# Altium PCB HCHO_Benchmark_B3.PcbDoc
Units mm, origin at the board's own origin, x right, y up, seen from the top; angles counter-clockwise.
Board outline 87.75 x 66 mm, 2 copper layers (Top Layer, Bottom Layer), stack 1.671 mm thick; 37 components, 36 nets, 119 pads, 40 vias.
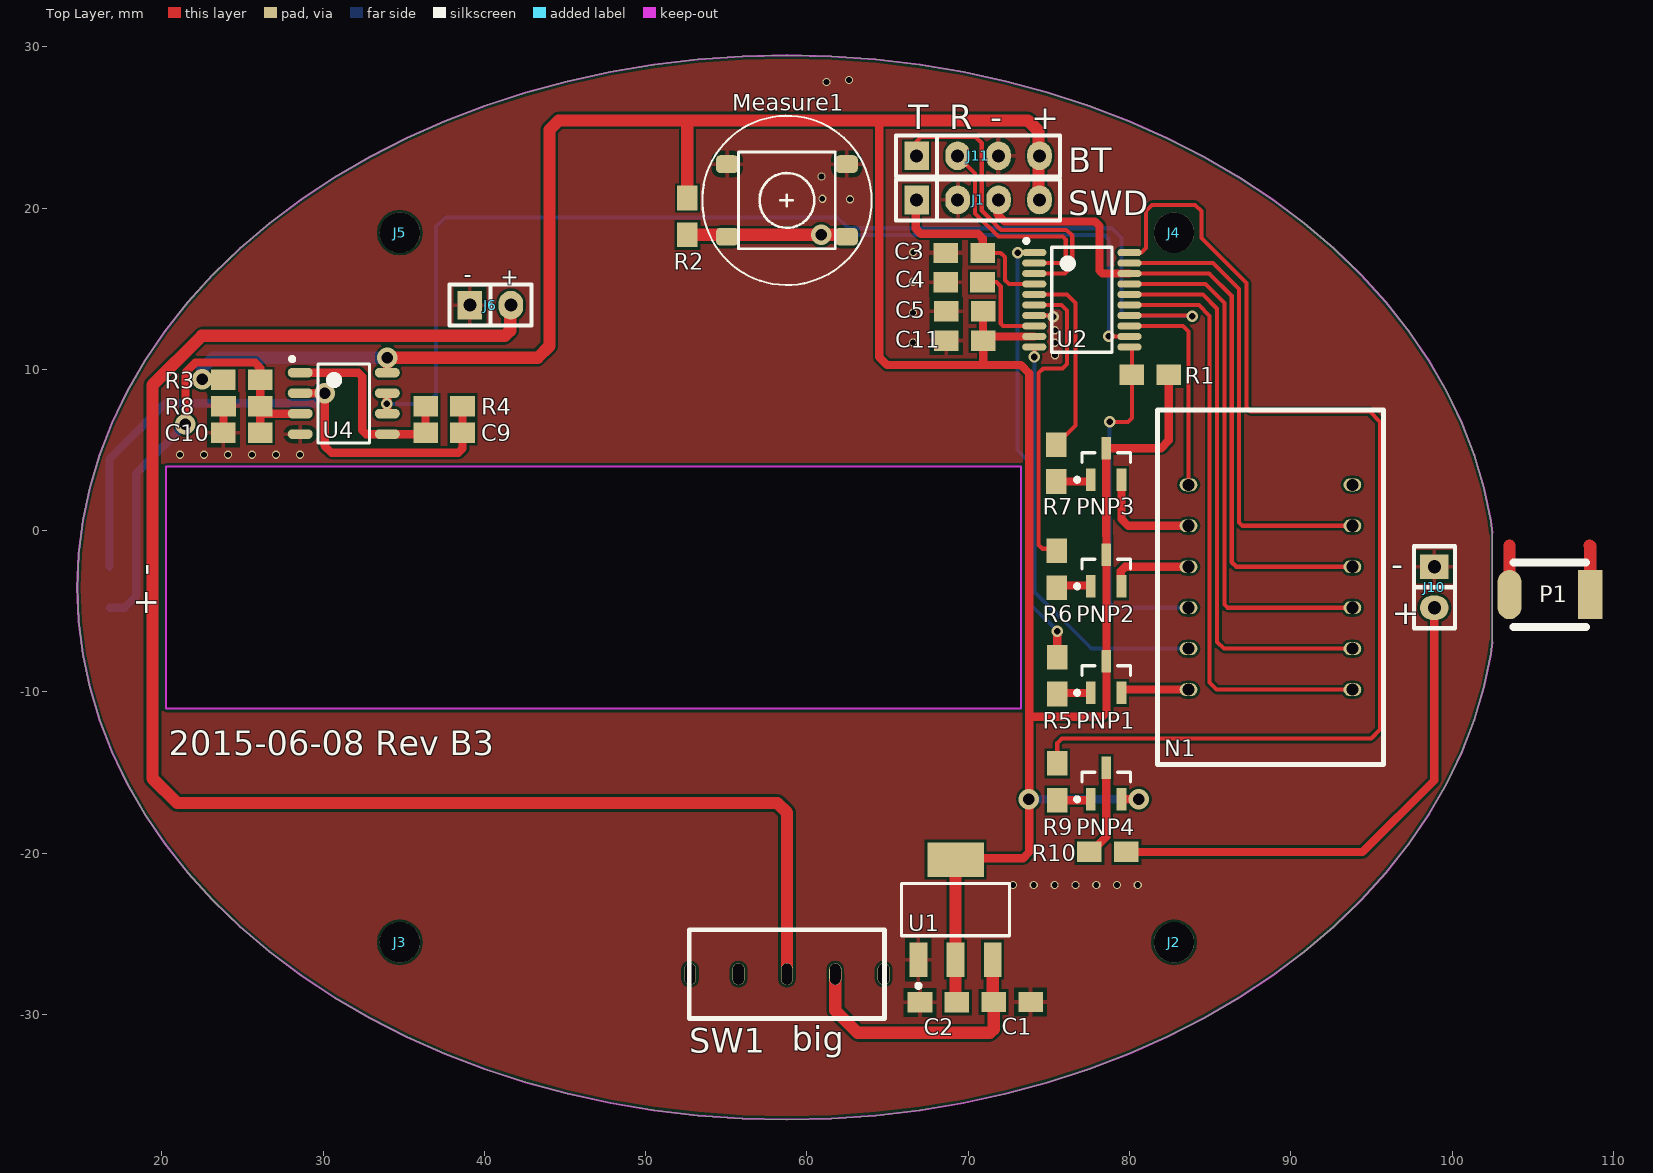
[diagram p0: Top Layer view]
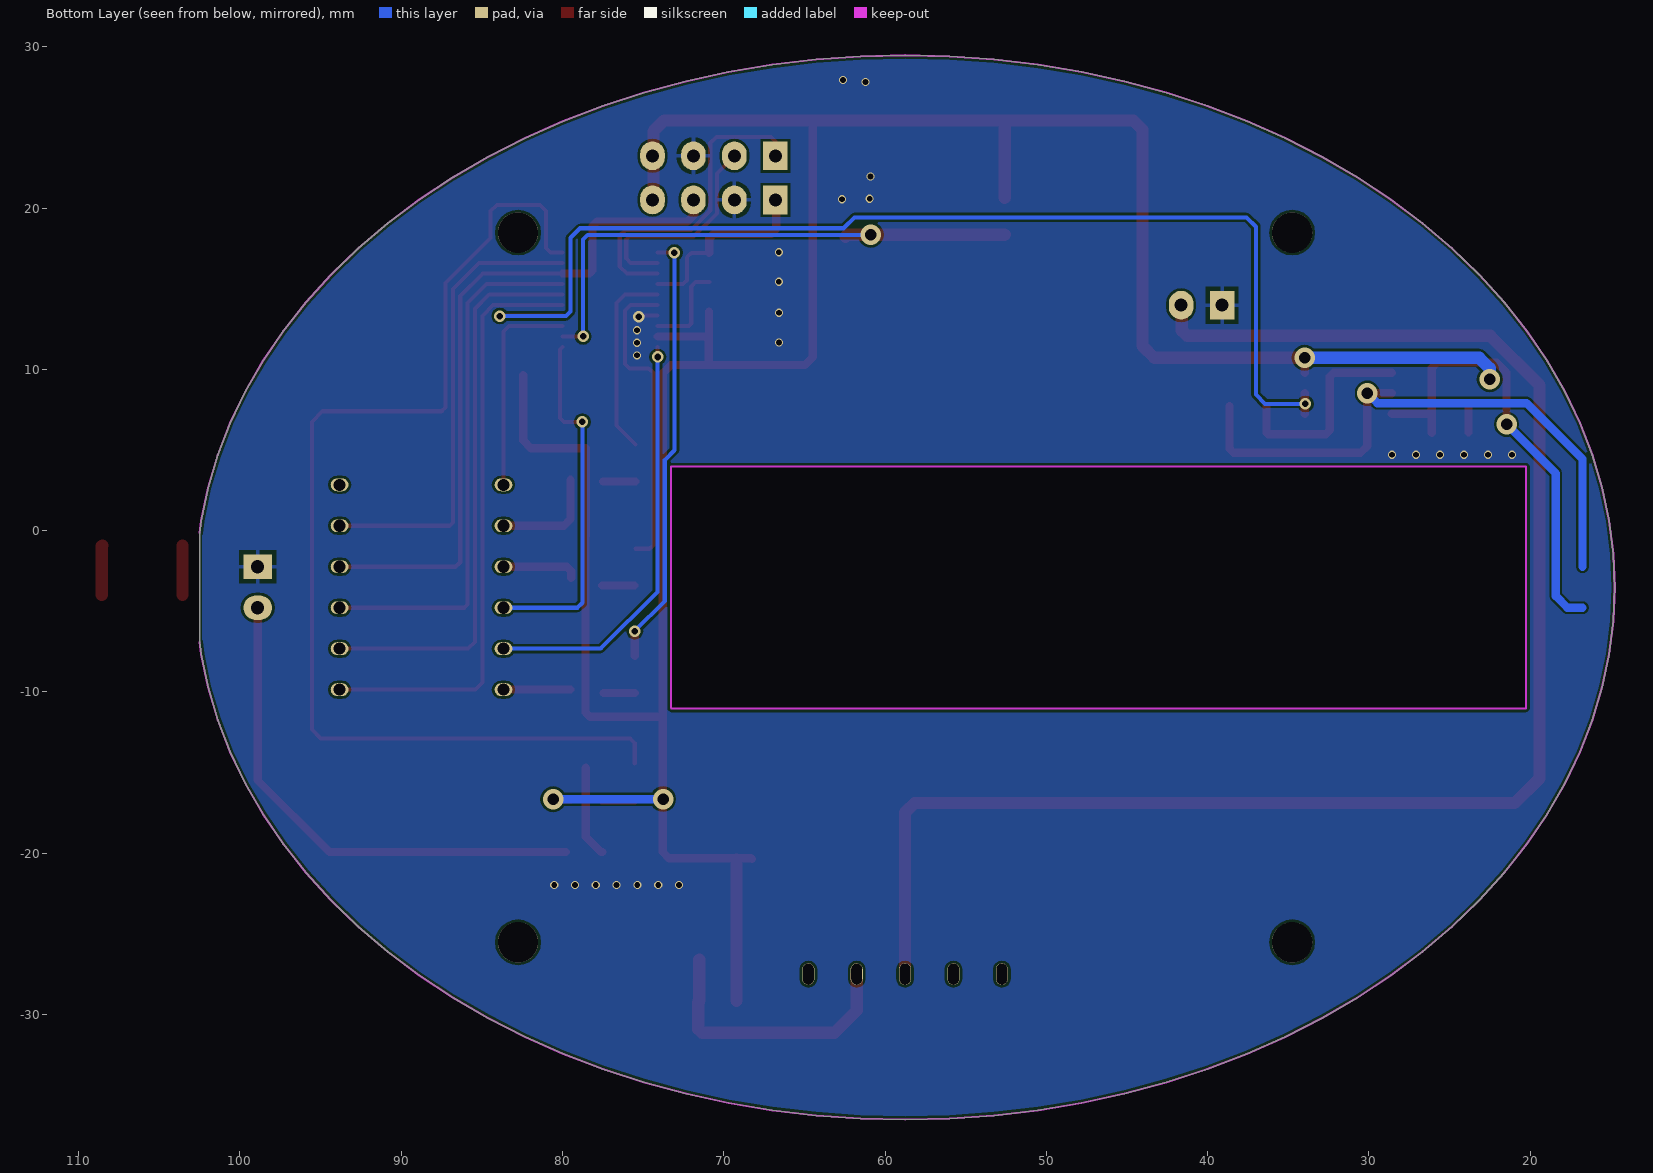
[diagram p1: Bottom Layer view, seen from below]

## Layer stack, top to bottom
Top Layer: signal copper 0.0356
Dielectric: core 1.6, FR-4, Dk 4.8
Bottom Layer: signal copper 0.0356

## Board outline
21.609,-21.206 20.202,-19.421 18.947,-17.574 17.849,-15.672 16.913,-13.721 16.142,-11.73 15.539,-9.707 15.106,-7.659 14.846,-5.596 14.759,-3.523 14.846,-1.451 15.106,0.613 15.539,2.66 16.142,4.683 16.913,6.674 17.849,8.625 18.947,10.527 20.202,12.374 21.609,14.159 23.163,15.873 24.857,17.512 26.685,19.067 28.639,20.533 30.713,21.904 32.897,23.174 35.183,24.339 37.562,25.395 40.025,26.336 42.562,27.159 45.163,27.861 47.817,28.44 50.515,28.892 53.245,29.216 55.997,29.411 58.759,29.477 61.522,29.411 64.274,29.216 67.004,28.892 69.702,28.44 72.356,27.861 74.957,27.159 77.494,26.336 79.957,25.395 82.336,24.339 84.622,23.174 86.806,21.904 88.88,20.533 90.834,19.067 92.662,17.512 94.356,15.873 95.91,14.159 97.317,12.374 98.572,10.527 99.67,8.625 100.606,6.674 101.377,4.683 101.98,2.66 102.413,0.613 102.509,-0.15 102.509,-0.155 102.509,-6.898 102.413,-7.659 101.98,-9.707 101.377,-11.73 100.606,-13.721 99.67,-15.672 98.572,-17.574 97.317,-19.421 95.91,-21.206 94.356,-22.92 92.662,-24.558 90.834,-26.113 88.88,-27.579 86.806,-28.95 84.622,-30.221 82.336,-31.386 79.957,-32.442 77.494,-33.383 74.957,-34.206 72.356,-34.908 69.702,-35.487 67.004,-35.939 64.274,-36.263 61.522,-36.458 58.759,-36.523 55.997,-36.458 53.245,-36.263 50.515,-35.939 47.817,-35.487 45.163,-34.908 42.562,-34.206 40.025,-33.383 37.562,-32.442 35.183,-31.386 32.897,-30.221 30.713,-28.95 28.639,-27.579 26.685,-26.113 24.857,-24.558 23.163,-22.92
cut-out: 20.265,3.967 20.272,3.96 73.266,3.96 73.266,-11.009 73.25,-11.024 20.265,-11.024

## Design rules (kind name [scope] priority, off if disabled: settings)
Clearance "6mil Special" [(HasFootprint('FPC 0.5mm 4P') OR HasFootprint('FPC 0.5mm 16P') OR HasFootprint('QFN40P500X500X90_HS-41L'))] p1: gap=0.152
Clearance "8mil all" [All] p2: gap=0.152
ComponentClearance [All] p1: gap=-100 collisioncheckmode=3 verticalgap=0.254 showdistances=FALSE
Height [All] p1: minheight=0 maxheight=50.8 prefheight=12.7
HoleSize [All] p1: absolutevalues=TRUE maxlimit=1817.048 minlimit=0 maxpercent=80.000 minpercent=20.000
HoleToHoleClearance [All] p1: gap=0.203 allowstackedmicrovias=TRUE
MinimumSolderMaskSliver [All] p1: minsoldermaskwidth=0
PolygonConnect PolygonConnect_1 [isvia] p1: connectstyle=Direct reliefconductorwidth=0.254 reliefentries=4 polygonreliefangle="90 Angle" airgapwidth=0.254
PolygonConnect [All] p2: connectstyle=Relief reliefconductorwidth=0.254 reliefentries=4 polygonreliefangle="90 Angle" airgapwidth=0.254
RoutingCorners [All] p1: cornerstyle=45-Degree minsetback=0.254 maxsetback=2.54
RoutingVias [All] p1: holewidth=0.356 width=0.508 viastyle="Through Hole" minholewidth=0.356 minwidth=0.508 maxholewidth=2.54 maxwidth=5.08
SilkToSilkClearance [All] p1: silktosilkclearance=0
SilkToSolderMaskClearance [IsPad] p1: minsilkscreentomaskgap=0 clearancetoexposedcopper=TRUE
SolderMaskExpansion [All] p1: expansion=0.102
Width 20mil_Power [(InNet('EP_SUPPLY&VBAT') OR InNet('PSUPPLY') OR InNet('P_3.3V') OR InNet('PSUPPLYBAT') OR InNet('P_3.3V') OR InNet('P_5V'))] p1: maxlimit=1000 minlimit=0.203 preferedwidth=0.508
Width 8mil_Basic [All] p2: maxlimit=100 minlimit=0.203 preferedwidth=0.254
20 further rules are at their usual default settings.

## Components (designator, comment, footprint, x,y, rotation, side; value= is the part's Value field where it differs from the comment)
C1 "10uf" C0805 72.724,-29.224 r0 top
C2 "10uf" C0805 68.154,-29.25 r180 top
C3 "1uf" C0805 69.756,17.216 r0 top
C4 "1uf" C0805 69.743,15.406 r0 top
C5 "1uf" C0805 69.783,13.597 r180 top
C9 "1uf" C0805 37.501,6.076 r0 top
C10 "10uf" C0805 24.963,6.076 r180 top
C11 "10uf" C0805 69.788,11.788 r180 top
J1 "CON4" CON4 70.612,20.507 r0 top
J2 "CON1" 2.5MM 82.76,-25.523 r0 top
J3 "CON1" 2.5MM 34.76,-25.523 r0 top
J4 "CON1" 2.5MM 82.76,18.477 r0 top
J5 "CON1" 2.5MM 34.76,18.477 r0 top
J6 "CON2" CON2 40.376,13.981 r0 top
J10 "CON2" CON2 98.902,-3.508 r270 top
J11 "CON4" CON4 70.612,23.241 r0 top
Measure1 "Patch_6x6x5" PATCH6X6X5 58.76,20.477 r180 top
N1 "LG3631BH" LG3631BH 88.742,-3.508 r90 top
P1 "photodetector" BPW34 106.065,-3.965 r180 top
PNP1 "8550" SOT23-3 78.556,-9.077 r90 top
PNP2 "8550" SOT23-3 78.556,-2.473 r90 top
PNP3 "8550" SOT23-3 78.556,4.131 r90 top
PNP4 "8550" SOT23-3 78.556,-15.681 r90 top
R1 "1K" R0805 81.29,9.659 r0 top
R2 "1K" R0805 52.588,19.483 r90 top
R3 "4.7K" R0805 24.958,9.372 r180 top
R4 "4.3M" R0805 37.501,7.728 r180 top
R5 "1K" R0805 75.524,-8.986 r90 top
R6 "1K" R0805 75.488,-2.396 r90 top
R7 "1K" R0805 75.466,4.193 r90 top
R8 "1K" R0805 24.968,7.728 r0 top
R9 "1K" R0805 75.524,-15.575 r90 top
R10 "1K" R0805 78.661,-19.92 r0 top
SW1 "SS12F44" SS12F44 58.76,-27.493 r180 top
U1 "1117-3.3" SOT223 69.215,-23.495 r0 top
U2 "STM8S003F3P6" STM8S003F3P6 77.05,14.316 r0 top
U4 "LMV358" LMV358_SOP 31.286,7.887 r0 top

## Footprints (in the part's own frame and the unit in brackets; to place one, negate y for a bottom-side part, rotate by r counter-clockwise, add the part's x,y. Pads: shape width x height; smd on the part's side, far side on the other; paste and mask are expansions set on the pad)
2.5MM [mm]
  round 2.5 hole 2.5: 1(0,0)
BPW34 [mm]
  rect 1.5x3.048 smd: A(-2.5,0)
  oval 1.5x3.048 smd: C(2.5,0)
  silkscreen extent -2.25,-2 2.25,2
C0805 [mil]
  rect 60x50 smd: 1(-45,0) 2(45,0)
  body extent -52,-25 55,25, height 31
CON2 [mil]
  rect 60x70 hole 32: 1(-50,0)
  oval 60x70 hole 32: 2(50,0)
  silkscreen extent -100,-50 100,50, body extent -101,-50 100,50, height 295
CON4 [mil]
  rect 60x70 hole 32: 1(-150,0)
  oval 60x70 hole 32: 2(-50,0) 3(50,0) 4(150,0)
  silkscreen extent -200,-50 200,50, body extent -201,-50 199,50, height 295
LG3631BH [mm]
  oval 0.8x1.1 hole 0.75: 1(-6.35,-5.08) 2(-3.81,-5.08) 3(-1.27,-5.08) 4(1.27,-5.08) 5(3.81,-5.08) 6(6.35,-5.08) 7(6.35,5.08) 8(3.81,5.08) 9(1.27,5.08) 10(-1.27,5.08) 11(-3.81,5.08) 12(-6.35,5.08)
  silkscreen extent -11,-7 11,7, body extent -10.98,-6.99 10.99,7, height 7.3
LMV358_SOP [mm] "TSOP, 8-Leads, Body 3.00x3.00mm, Pitch 0.65mm, IPC Medium Density"
  oval 1.55x0.6 smd: 1(-2.7,1.905) 2(-2.7,0.635) 3(-2.7,-0.635) 4(-2.7,-1.905) 5(2.7,-1.905) 6(2.7,-0.635) 7(2.7,0.635) 8(2.7,1.905)
  silkscreen extent -3.32,-2.45 1.6,2.87, body extent -1.95,-2.47 1.93,2.46, height 1.1
PATCH6X6X5 [mm]
  rrect50% 1.4x1.1 smd: 1(-3.7,2.25) 2(3.7,2.25) 3(3.7,-2.25) 4(-3.7,-2.25)
  silkscreen extent -3,-3 3,3, body extent -4.13,-3 4.13,3, height 5
R0805 [mil]
  rect 60x50 smd: 1(-45,0) 2(45,0)
  body extent -52,-25 55,25, height 31
SOT23-3 [mm]
  rect 1.4x0.6 smd: 1(-0.975,0.95) 2(-0.975,-0.95) 3(0.975,0)
  silkscreen extent -1.1,-1.5 0.7,1.92, body extent -0.7,-1.5 0.7,1.5, height 1
SOT223 [mm]
  rect 1.1x2.15 smd: 1(-2.3,-3.1) 2(0,-3.1) 3(2.3,-3.1)
  rect 3.5x2.15 smd: 4(0,3.1)
  silkscreen extent -3.35,-4.85 3.35,1.63, body extent -3.3,-3.2 3.3,3.1, height 1.7
SS12F44 [mm]
  oval 0.75x1.35 hole 0.65 slot 1.3 at 90 deg: 1(-6,0) 2(-3,0) 3(0,0) 4(3,0) 5(6,0)
  silkscreen extent -6.05,-2.75 6.05,2.75, body extent -6.05,-2.75 6.05,2.75, height 11
STM8S003F3P6 [mm]
  oval 1.5x0.45 smd: 1(-2.95,2.925) 2(-2.95,2.275) 3(-2.95,1.625) 4(-2.95,0.975) 5(-2.95,0.325) 6(-2.95,-0.325) 7(-2.95,-0.975) 8(-2.95,-1.625) 9(-2.95,-2.275) 10(-2.95,-2.925) 11(2.95,-2.925) 12(2.95,-2.275) 13(2.95,-1.625) 14(2.95,-0.975) 15(2.95,-0.325) 16(2.95,0.325) 17(2.95,0.975) 18(2.95,1.625) 19(2.95,2.275) 20(2.95,2.925)
  silkscreen extent -3.57,-3.25 1.88,3.77, body extent -2.22,-3.25 2.2,3.24, height 1.2

## Part data
C1 C2 C3 C4 C5 C9 C10 C11: library part C
PNP1 PNP2 PNP3 PNP4: library part PNP
R1 R2 R3 R4 R5 R6 R7 R8 R9 R10: library part R
U1: library part 1117

## Via types
v1: diameter 0.508, hole 0.356, Top Layer to Bottom Layer, 25 vias
v2: diameter 0.711, hole 0.406, Top Layer to Bottom Layer, 8 vias
v3: diameter 1.27, hole 0.711, Top Layer to Bottom Layer, 7 vias

## Nets (pads, with @x,y where several pads share a name; then routed paths per layer and width w, separated by ;. In a path a pad name is that pad's centre, name@x,y a point inside that pad or via, vN(x,y) a via of type N, cw(c..) or ccw(c..) an arc to the next point about the centre after c; other vN are vias at no path point)
-INA: C9.2 R4.1 U4.2 | length 38
  Top Layer w0.508: U4.2 v3(30.101,8.522) 30.101,5.262 30.532,4.83 38.391,4.83 38.644,5.083 C9.2 R4.1
  Bottom Layer w0.508: 16.761,-2.238 16.761,4.442 20.223,7.904 29.483,7.904 v3(30.101,8.522)
C_LASER: R9.2 U2.20 | length 69.9
  Top Layer w0.254: R9.2 75.524,-13.166 75.804,-12.886 94.99,-12.886 95.538,-12.338 95.538,6.737 94.869,7.407 87.49,7.407 87.257,7.64 87.257,15.349 84.455,18.151 84.455,19.812 84.074,20.193 81.407,20.193 81.026,19.812 81.026,17.526 80.741,17.241 U2.20
GND: C1.2 C2.2 C3.1 C4.1 C5.2 C10.2 C11.2 J1.2 J6.1 J10.1 J11.3 Measure1.3 Measure1.4 R8.1 U1.1 U2.7 U4.4 | length 2.8
  Top Layer w0.254: U2.7 75.011,13.341 v2@75.047,13.305
  Top Layer w0.508: C10.2@23.825,6.08 R8.1
  Bottom Layer w0.254: v2@75.047,13.305 v2@75.286,13.305
  other v1: 72.78,-21.971 74.07,-21.971 75.359,-21.971 76.649,-21.971 77.939,-21.971 79.228,-21.971 80.518,-21.971 21.137,4.702 22.623,4.702 24.109,4.702 25.595,4.702 27.081,4.702 28.567,4.702 75.388,10.868 66.575,11.667 75.388,11.648 75.388,12.428 66.575,13.512 66.586,15.433 66.586,17.266 62.668,20.548 60.959,20.585 60.909,21.957 61.214,27.813 62.611,27.94
  other v2: 75.279,13.251
HCHO_ADC: U2.14 U4.6 U4.7 | length 71.2
  Top Layer w0.254: U2.14 83.848,13.341 v2(83.885,13.304)
  Top Layer w0.508: U4.6 U4.7
  Bottom Layer w0.254: v2(33.937,7.861) 36.439,7.861 37.015,8.437 37.015,18.843 37.597,19.425 61.901,19.425 62.576,18.75 78.913,18.75 79.502,18.161 79.502,13.589 79.787,13.304 v2(83.885,13.304)
N_A: N1.11 U2.10 | length 26.2
  Top Layer w0.254: v2(74.1,10.769) U2.10
  Bottom Layer w0.254: v2(74.1,10.769) 74.117,10.752 74.117,-3.802 77.633,-7.318 N1.11
N_B: N1.7 U2.13 | length 13.3
  Top Layer w0.254: U2.13 83.321,12.691 83.662,12.349 N1.7
N_C: J1.3 N1.4 U2.18 | length 43.2
  Top Layer w0.254: U2.18 84.944,15.941 86.342,14.543 86.342,-1.958 86.622,-2.238 N1.4
  Top Layer w0.508: J1.3@71.825,20.507 71.825,19.615 72.263,19.177 77.851,19.177 78.142,18.886 78.142,16.134 78.335,15.941 U2.18
N_COM1: R5.2 U2.1 | length 27.1
  Top Layer w0.254: v2(73.062,17.241) U2.1
  Top Layer w0.508: R5.2@75.524,-7.775 v2(75.524,-6.231)
  Bottom Layer w0.254: v2(73.062,17.241) 73.062,4.986 73.66,4.388 73.66,-4.367 v2(75.524,-6.231)
N_COM2: R6.2 U2.6 | length 19.4
  Top Layer w0.254: U2.6 75.794,13.991 76.124,13.661 76.124,10.335 75.853,10.064 74.654,10.064 74.371,9.781 74.371,-0.886 74.605,-1.121 R6.2@75.488,-1.121
N_COM3: R7.2 U2.5 | length 12
  Top Layer w0.254: U2.5 76.132,14.641 76.65,14.122 76.65,6.52 R7.2
N_D: N1.2 U2.16 | length 35
  Top Layer w0.254: U2.16 84.545,14.641 85.428,13.758 85.428,-6.897 85.849,-7.318 N1.2
N_DP: N1.3 U2.17 | length 33.1
  Top Layer w0.254: U2.17 84.72,15.291 85.885,14.126 85.885,-4.58 86.083,-4.778 N1.3
N_E: N1.1 U2.15 | length 37
  Top Layer w0.254: U2.15 84.299,13.991 84.971,13.319 84.971,-9.426 85.403,-9.858 N1.1
N_F: N1.10 R1.1 U2.11 | length 22.2
  Top Layer w0.254: v2(78.771,6.747) 79.909,6.747 80.147,6.985 R1.1 80.147,11.243 U2.11
  Bottom Layer w0.254: v2(78.771,6.747) 78.771,-4.471 79.079,-4.778 N1.10
N_G: N1.5 U2.19 | length 29
  Top Layer w0.254: U2.19 85.187,16.591 86.8,14.978 86.8,0.518 87.016,0.302 N1.5
NetC1_1: C1.1 SW1.2 U1.3 | length 17
  Top Layer w0.762: SW1.2 61.76,-29.756 63.137,-31.133 71.356,-31.133 71.581,-30.908 C1.1 ; C1.1@71.515,-29.159 U1.3
NetC4_2: C4.2 U2.8 | length 5.7
  Top Layer w0.254: C4.2 71.756,15.406 72.018,15.144 72.018,12.844 72.171,12.691 U2.8
NetJ6_2: J6.2 SW1.3 | length 99.7
  Top Layer w0.762: J6.2@41.6,13.912 41.6,12.402 41.282,12.084 22.484,12.084 19.431,9.031 19.431,-15.367 20.955,-16.891 58.166,-16.891 58.76,-17.485 SW1.3
NetJ9_1: P1.A | length 3.1
  Top Layer w0.762: 108.525,-0.917 108.565,-0.957 P1.A
NetJ10_2: J10.2 R10.2 | length 31.6
  Top Layer w0.508: R10.2 94.458,-19.92 98.902,-15.477 J10.2
NetJ11_1: J11.1 U2.3 | length 20.1
  Top Layer w0.254: J11.1 66.802,24.13 67.081,24.409 70.46,24.409 70.841,24.028 70.841,19.845 72.042,18.644 76.098,18.644 76.454,18.288 76.454,16.383 76.012,15.941 U2.3
NetJ11_2: J11.2 U2.2 | length 13.6
  Top Layer w0.254: J11.2 70.434,22.149 70.434,19.677 71.874,18.237 75.87,18.237 76.048,18.059 76.048,16.866 75.773,16.591 U2.2
NetJ12_1: P1.C | length 3
  Top Layer w0.762: P1.C 103.564,-0.917
NetN1_8: N1.8 PNP3.2 | length 6.8
  Top Layer w0.508: PNP3.2 79.506,0.721 79.925,0.302 N1.8
NetN1_9: N1.9 PNP2.2 | length 4.7
  Top Layer w0.508: PNP2.2@79.464,-2.918 79.464,-2.5 79.721,-2.243 N1.9@83.657,-2.243
NetN1_12: N1.12 PNP1.2 | length 4.1
  Top Layer w0.508: PNP1.2@79.506,-9.851 N1.12@83.654,-9.851
NetPNP1_1: PNP1.1 R5.1 | length 1.9
  Top Layer w0.508: R5.1@75.524,-10.061 PNP1.1@77.453,-10.061
NetPNP2_1: PNP2.1 R6.1 | length 2
  Top Layer w0.508: R6.1@75.531,-3.401 PNP2.1@77.531,-3.401
NetPNP3_1: PNP3.1 R7.1 | length 2
  Top Layer w0.508: R7.1 PNP3.1@77.5,3.05
NetPNP4_1: PNP4.1 R9.1 | length 2
  Top Layer w0.508: R9.1 PNP4.1@77.543,-16.718
NetPNP4_3: PNP4.3 R10.1 | length 5.7
  Top Layer w0.508: R10.1 77.622,-19.92 78.556,-18.986 PNP4.3
NRESET: C3.2 J1.1 U2.4 | length 11.9
  Top Layer w0.254: C3.2 72.02,17.216 72.28,16.955 72.28,15.529 72.518,15.291 U2.4
  Top Layer w0.508: J1.1@66.745,20.507 66.745,18.726 67.056,18.415 70.612,18.415 70.899,18.128 C3.2
OUT1: C9.1 R4.2 U4.1 U4.5 | length 12.9
  Top Layer w0.508: U4.1 32.195,9.792 32.424,9.564 32.424,6.23 32.671,5.982 U4.5 C9.1@36.264,5.982 ; C9.1 R4.2
P_3.3V: C2.1 C5.1 C11.1 J1.4 J11.4 PNP1.3 PNP2.3 PNP3.3 PNP4.2 R1.2 R2.2 R3.2 U1.2 U1.4 U2.9 U4.8 | length 189.4
  Top Layer w0.508: U4.8 v3(33.986,10.721) ; 64.483,25.425 64.483,10.759 64.971,10.271 70.931,10.271 ; U1.4@68.25,-20.365 U1.4@68.301,-20.313 ; U1.4@68.301,-20.309 U1.4@68.301,-20.313 ; C11.1@70.926,11.793 C5.1 ; 73.862,-11.534 78.318,-11.534 78.571,-11.281 78.571,-0.309 78.556,-0.293 PNP3.3 81.958,5.106 82.433,5.582 R1.2 ; U2.9 71.184,12.041 C11.1 70.931,10.271 ; PNP4.2 v3(80.58,-16.656) ; U1.4@68.301,-20.313 73.403,-20.313 73.787,-19.93 73.787,9.757 73.273,10.271 70.931,10.271
  Top Layer w0.762: v3(33.986,10.721) 43.312,10.721 44.041,11.449 44.041,24.854 44.612,25.425 52.589,25.425 ; R2.2 52.588,25.423 52.589,25.425 ; C2.1@69.215,-29.169 U1.2 U1.4 ; J1.4@74.365,20.507 74.365,24.772 73.713,25.425 64.483,25.425 52.589,25.425
  Bottom Layer w0.508: v3(73.768,-16.643) 73.78,-16.656 v3(80.58,-16.656)
  Bottom Layer w0.762: v3(22.509,9.378) 22.509,10.063 23.167,10.721 v3(33.986,10.721)
TRRIGLE: Measure1.1 Measure1.2 R2.1 U2.12 | length 35.2
  Top Layer w0.254: v2(78.727,12.041) U2.12
  Top Layer w0.762: R2.1 62.346,18.34 Measure1.1
  Bottom Layer w0.254: v3(60.885,18.343) 78.438,18.343 78.727,18.054 v2(78.727,12.041)
V0.58: C10.1 R3.1 R8.2 U4.3 | length 28.7
  Top Layer w0.508: v3(21.467,6.6) 21.467,9.81 22.077,10.42 25.775,10.42 26.101,10.094 R3.1 26.106,9.367 C10.1 ; R8.2@26.111,7.393 26.252,7.252 U4.3
  Bottom Layer w0.508: 16.761,-4.778 17.701,-4.778 18.415,-4.064 18.415,3.547 21.345,6.477 v3@21.59,6.477
pads on no net: J2.1 J3.1 J4.1 J5.1 N1.6 SW1.1 SW1.4 SW1.5

## Polygon pours and split planes (outlines as drawn)
GND on Bottom Layer "Bottom Layer-No Net" (solid, remove dead copper, pour order 6): 1.212,32.706 104.971,32.706 105.098,32.833 105.225,32.706 105.225,-39.176 1.212,-39.176 1.085,-39.049
GND on Top Layer "Bottom Layer-No Net" (solid, remove dead copper, pour order 8): -2.188,39.191 111.031,39.191 111.031,-41.001 110.903,-41.129 108.863,-39.079 -1.933,-39.079

## Keep-outs
Keep-Out Layer:
  lines w0.01: 102.509,-6.898 102.509,-0.155
  lines w0.127: 20.265,3.967 73.266,3.967 ; 20.265,3.971 20.265,-11.024 73.25,-11.024 73.266,-11.009 73.266,3.96 ; 102.509,-6.898 102.413,-7.659 101.98,-9.707 101.377,-11.73 100.606,-13.721 99.67,-15.672 98.572,-17.574 97.317,-19.421 95.91,-21.206 94.356,-22.92 92.662,-24.558 90.834,-26.113 88.88,-27.579 86.806,-28.95 84.622,-30.221 82.336,-31.386 79.957,-32.442 77.494,-33.383 74.957,-34.206 72.356,-34.908 69.702,-35.487 67.004,-35.939 64.274,-36.263 61.522,-36.458 58.759,-36.523 55.997,-36.458 53.245,-36.263 50.515,-35.939 47.817,-35.487 45.163,-34.908 42.562,-34.206 40.025,-33.383 37.562,-32.442 35.183,-31.386 32.897,-30.221 30.713,-28.95 28.639,-27.579 26.685,-26.113 24.857,-24.558 23.163,-22.92 21.609,-21.206 20.202,-19.421 18.947,-17.574 17.849,-15.672 16.913,-13.721 16.142,-11.73 15.539,-9.707 15.106,-7.659 14.846,-5.596 14.759,-3.523 14.846,-1.451 15.106,0.613 15.539,2.66 16.142,4.683 16.913,6.674 17.849,8.625 18.947,10.527 20.202,12.374 21.609,14.159 23.163,15.873 24.857,17.512 26.685,19.067 28.639,20.533 30.713,21.904 32.897,23.174 35.183,24.339 37.562,25.395 40.025,26.336 42.562,27.159 45.163,27.861 47.817,28.44 50.515,28.892 53.245,29.216 55.997,29.411 58.759,29.477 61.522,29.411 64.274,29.216 67.004,28.892 69.702,28.44 72.356,27.861 74.957,27.159 77.494,26.336 79.957,25.395 82.336,24.339 84.622,23.174 86.806,21.904 88.88,20.533 90.834,19.067 92.662,17.512 94.356,15.873 95.91,14.159 97.317,12.374 98.572,10.527 99.67,8.625 100.606,6.674 101.377,4.683 101.98,2.66 102.413,0.613 102.509,-0.15

## Silkscreen, mask and mechanical layers (free items; w line width, h text height)
Top Overlay:
  circle w0.127: c58.759,20.477 r5.25
  text "T" at 66.294,24.892 h1.52
  text "R" at 68.834,24.892 h1.52
  text "-" at 71.374,24.892 h1.52
  text "+" at 73.914,24.892 h1.52
  text "BT" at 76.2,22.225 h1.52
  text "SWD" at 76.2,19.558 h1.52
  text "+" at 41.152,16.269 h1.02 r270
  text "-" at 38.735,15.367 h1.02
  text "-" at 19.685,-2.794 h1.52 r90
  text "-" at 96.217,-2.826 h1.52
  text "+" at 19.685,-5.334 h1.52 r90
  text "+" at 96.265,-5.807 h1.52
  text "2015-06-08 Rev B3" at 20.418,-13.931 h1.52
  text "big" at 59.055,-32.258 h1.52
Mechanical 1:
  lines w0.127: 102.54,-6.845 109.54,-6.845 109.54,-0.195 108.04,-0.195 107.84,0.151 108.04,0.151 108.04,2.105 104.04,2.105 104.04,0.151 104.24,0.151 104.04,-0.195 102.54,-0.195 ; 103.79,-5.595 108.29,-5.595 108.29,-2.095 103.79,-2.095 103.79,-5.595

## Text inside footprints (layer, text, board x,y; h text height)
U4: Mechanical 15 "1" at 31.736,7.723 h0.75 r90